# Altium PCB Mach do dong routed.PcbDoc (part 2 of 2)
Units mm, origin at the board's own origin, x right, y up, seen from the top; angles counter-clockwise.
Board outline 79.99 x 80 mm, 4 copper layers (Top Layer, Int1 (GND), Int2 (PWR), Bottom Layer), stack 1.566 mm thick; 97 components, 75 nets, 365 pads, 457 vias.
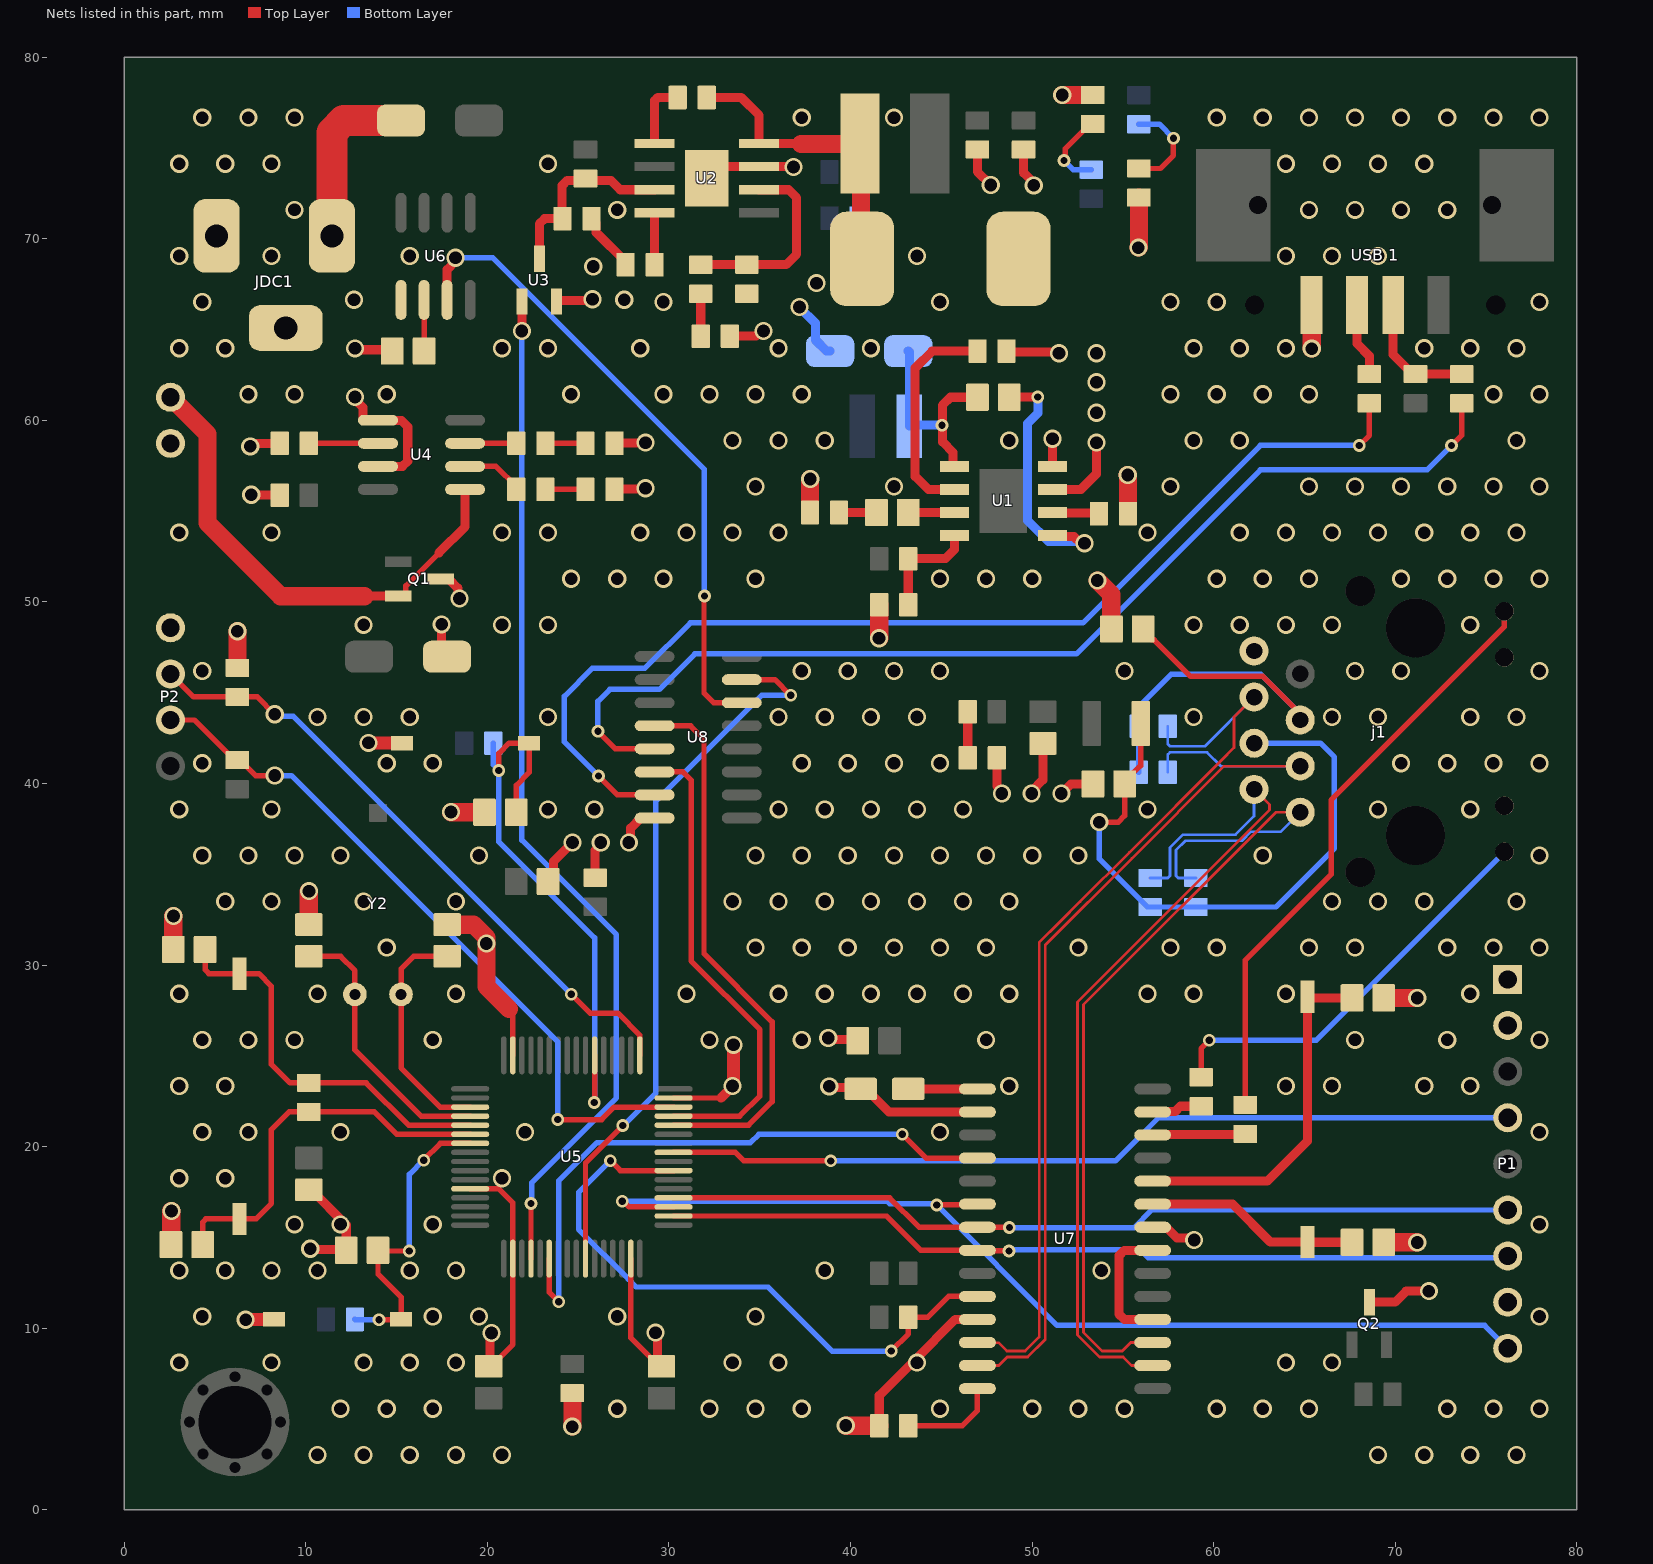
[diagram p4: the nets of this part, all layers, seen from the top]

## Via types
v1: diameter 1, hole 0.7, Top Layer to Bottom Layer, tented both sides, 423 vias
v2: diameter 0.7, hole 0.4, Top Layer to Bottom Layer, tented both sides, 34 vias

## Nets (pads, with @x,y where several pads share a name; then routed paths per layer and width w, separated by ;. In a path a pad name is that pad's centre, name@x,y a point inside that pad or via, vN(x,y) a via of type N, cw(c..) or ccw(c..) an arc to the next point about the centre after c; other vN are vias at no path point) (continued)
GND: "USB 1.4" C3.2 C4.2 C6.2 C7.2 C8.1 C9.2 C10.2 C11.1 C12.1 C13.1 C14.2 C15.1 C16.2 C17.2 C18.1 C19.2 C20.1 C21.1 C22.1 C23.1 C24.2 C25.1 D2.1 D3.1 D5.2 D6.2 D7.2 D8.2 D9.2 j1.8 j1.10 j1.11 JDC1.2 JDC1.3 ON/OFF.2 P1.2 P2.4 P3.2 R6.2 R7.2 R8.1 R10.2 R11.2 R12.1 R13.1 R19.1 R20.1 R21.2 R24.1 R37.2 RESET1.2 U1.8 U2.7 U2.9 U3.2 U4.1 U4.3 U5.12 U5.18 U5.31 U5.47 U5.63 U6.5 U7.2 U7.11 U7.18 U7.21 U7.22 U8.8 | length 161.5
  Top Layer w0.3: U5.12@19.05,17.679 20.624,17.679 21.4,16.903 U5.18@21.4,13.829 21.4,9.104 C10.2@20.191,7.895 ; 21.184,27.584 21.4,27.368 U5.63@21.4,25.029 ; U5.31@27.9,13.829 27.9,9.461 29.466,7.895 C16.2@29.591,7.895 ; U5.47@30.25,22.679 32.864,22.679
  Top Layer w0.5: C13.1@2.568,14.605 C13.1@2.579,14.616 ; v1@2.579,16.448 v1(2.591,16.459) ; v1(6.68,10.465) v1@6.694,10.479 ; v1(6.934,58.572) 7.07,58.572 7.236,58.739 R19.1@8.56,58.739 R19.1@8.549,58.75 ; v1(6.985,55.905) 6.998,55.893 8.547,55.893 R21.2@8.56,55.88 ; C9.2@10.16,17.619 10.285,17.619 12.22,15.684 C17.2@12.22,14.289 12.176,14.333 10.28,14.333 v1(10.236,14.376) ; v1(12.7,61.29) 12.7,61.155 13.151,60.704 13.151,60.055 13.197,60.009 U4.1@13.97,60.009 13.989,59.99 15.27,59.99 15.611,59.649 15.611,57.762 15.318,57.469 U4.3@13.97,57.469 ; v1(12.7,63.97) 12.775,63.894 14.685,63.894 C14.2@14.76,63.819 ; C10.2@20.066,7.895 20.142,7.971 20.142,9.652 v1(20.218,9.728) ; C8.1@23.34,34.609 23.633,34.902 23.633,35.712 23.647,35.712 v1(24.689,36.754) ; U3.2@23.81,66.549 23.81,66.562 23.86,66.612 25.718,66.612 v1(25.781,66.675) ; R12.1@25.73,71.12 25.98,70.87 25.98,70.36 27.61,68.73 R13.1@27.61,68.58 ; R20.1@25.933,34.811 25.933,36.314 26.238,36.618 v1(26.238,36.754) ; D8.2@27,56.199 27.031,56.23 28.671,56.23 v1(28.702,56.261) ; D7.2@27,58.739 27.018,58.757 28.684,58.757 v1(28.702,58.776) ; v1(27.788,36.754) 27.883,36.849 27.883,37.546 28.437,38.1 U8.8@29.21,38.1 ; v1(29.261,9.754) 29.356,9.658 29.356,8.13 C16.2@29.591,7.895 ; U2.9@32.085,73.344 32.72,73.979 U2.7@34.96,73.979 36.841,73.979 v1(36.855,73.965) ; 32.864,22.679 v1@33.553,23.368 ; C7.2@33.35,64.643 34.79,64.643 35.069,64.922 v1(35.204,64.922) ; v1(38.774,25.984) 38.85,25.908 40.324,25.908 C11.1@40.4,25.832 ; v1(38.825,23.317) 38.894,23.248 40.491,23.248 C19.2@40.56,23.179 40.845,23.179 42.115,21.909 U7.2@46.99,21.909 ; R37.2@41.58,4.623 41.58,6.286 43.527,8.232 45.773,10.479 U7.11@46.99,10.479 ; C4.2@46.99,74.919 46.99,73.711 v1(47.727,72.974) ; D9.2@48.057,41.416 48.057,39.861 48.336,39.582 v1(48.336,39.446) ; C3.2@49.53,74.919 49.53,73.643 50.089,73.084 v1(50.089,72.949) ; v1(49.975,39.446) 49.975,39.582 50.597,40.204 C23.1@50.597,42.206 ; U1.8@51.12,57.469 v1(51.12,58.994) ; v1(51.613,39.446) 52.146,39.98 C20.1@53.354,39.98 ; C25.1@54.363,48.521 C25.1@54.37,48.514 ; U7.18@56.642,10.479 55.081,10.479 54.788,10.772 54.788,13.996 55.081,14.289 U7.21@56.642,14.289 ; U7.22@56.642,15.559 57.383,15.559 57.987,14.955 58.832,14.955 v1(58.928,14.859)
  Top Layer w0.7: v1@6.694,10.479 RESET1.2@8.24,10.479 ; v1@13.465,42.229 ON/OFF.2@15.296,42.229 ; v1@33.553,23.368 v1(33.553,25.603)
  Top Layer w1: C13.1@2.579,14.616 v1@2.579,16.448 ; C12.1@2.695,30.861 v1@2.695,32.692 ; R7.2@6.223,46.369 v1(6.223,48.387) ; C18.1@10.16,32.23 v1@10.16,34.061 ; C15.1@17.78,32.23 17.786,32.224 19.234,32.224 19.939,31.519 v1(19.939,31.191) 19.939,28.829 21.184,27.584 ; v1@18.009,38.419 C24.2@19.84,38.419 ; v1@24.679,4.589 R24.1@24.679,6.42 ; R10.2@37.77,54.929 v1@37.77,56.76 ; v1@39.749,4.623 R37.2@41.58,4.623 ; v1@41.58,48.018 R6.2@41.58,49.849 ; v1(51.663,77.927) D5.2@53.34,77.927 ; v1(53.594,51.181) 54.363,50.412 C25.1@54.363,48.521 ; v1(55.27,56.998) 55.283,56.985 R11.2@55.283,54.864 ; v1(55.855,69.52) 55.88,69.545 D6.2@55.88,72.277 ; 65.39,66.359 65.405,66.344 v1(65.405,63.957) ; C22.1@69.375,14.732 v1@71.206,14.732 ; C21.1@69.375,28.194 v1@71.206,28.194
  Bottom Layer w0.5: v1(37.186,66.243) 38.069,65.359 38.069,64.43 38.68,63.819 D3.1@38.88,63.819
  other v1: 10.64,3.019 13.18,3.019 15.72,3.019 18.26,3.019 20.8,3.019 69.06,3.019 71.6,3.019 74.14,3.019 76.68,3.019 24.667,4.577 39.737,4.634 11.91,5.559 14.45,5.559 16.99,5.559 27.15,5.559 32.23,5.559 34.77,5.559 37.31,5.559 44.93,5.559 50.01,5.559 52.55,5.559 55.09,5.559 60.17,5.559 62.71,5.559 65.25,5.559 72.87,5.559 75.41,5.559 77.95,5.559 3.02,8.099 8.1,8.099 13.18,8.099 15.72,8.099 18.26,8.099 33.5,8.099 36.04,8.099 43.66,8.099 63.98,8.099 66.52,8.099 4.29,10.639 16.99,10.639 19.53,10.639 27.15,10.639 34.77,10.639 77.95,10.639 3.02,13.179 5.56,13.179 8.1,13.179 10.64,13.179 15.72,13.179 18.26,13.179 38.58,13.179 53.82,13.179 71.218,14.721 9.37,15.719 11.91,15.719 16.99,15.719 77.95,15.719 3.02,18.259 5.56,18.259 20.8,18.259 4.29,20.799 6.83,20.799 11.91,20.799 22.07,20.799 44.93,20.799 77.95,20.799 3.02,23.339 5.56,23.339 33.5,23.339 48.74,23.339 63.98,23.339 66.52,23.339 71.6,23.339 74.14,23.339 4.29,25.879 6.83,25.879 9.37,25.879 16.99,25.879 32.23,25.879 37.31,25.879 47.47,25.879 67.79,25.879 72.87,25.879 77.95,25.879 71.218,28.183 3.02,28.419 10.64,28.419 18.26,28.419 30.96,28.419 36.04,28.419 38.58,28.419 41.12,28.419 43.66,28.419 46.2,28.419 48.74,28.419 56.36,28.419 58.9,28.419 63.98,28.419 74.14,28.419 14.45,30.959 34.77,30.959 37.31,30.959 39.85,30.959 42.39,30.959 44.93,30.959 47.47,30.959 52.55,30.959 57.63,30.959 60.17,30.959 65.25,30.959 67.79,30.959 72.87,30.959 75.41,30.959 77.95,30.959 2.706,32.704 5.56,33.499 8.1,33.499 13.18,33.499 18.26,33.499 33.5,33.499 36.04,33.499 38.58,33.499 41.12,33.499 43.66,33.499 46.2,33.499 48.74,33.499 66.52,33.499 69.06,33.499 71.6,33.499 76.68,33.499 10.171,34.073 4.29,36.039 6.83,36.039 9.37,36.039 11.91,36.039 19.53,36.039 34.77,36.039 37.31,36.039 39.85,36.039 42.39,36.039 44.93,36.039 47.47,36.039 50.01,36.039 52.55,36.039 62.71,36.039 77.95,36.039 17.997,38.43 3.02,38.579 8.1,38.579 23.34,38.579 25.88,38.579 36.04,38.579 38.58,38.579 41.12,38.579 43.66,38.579 46.2,38.579 56.36,38.579 69.06,38.579 74.14,38.579 4.29,41.119 14.45,41.119 16.99,41.119 37.31,41.119 39.85,41.119 42.39,41.119 44.93,41.119 70.33,41.119 72.87,41.119 75.41,41.119 77.95,41.119 13.453,42.24 10.64,43.659 13.18,43.659 15.72,43.659 23.34,43.659 36.04,43.659 38.58,43.659 41.12,43.659 43.66,43.659 58.9,43.659 66.52,43.659 69.06,43.659 74.14,43.659 76.68,43.659 4.29,46.199 37.31,46.199 39.85,46.199 42.39,46.199 44.93,46.199 55.09,46.199 67.79,46.199 70.33,46.199 77.95,46.199 41.569,48.006 13.18,48.739 20.8,48.739 23.34,48.739 58.9,48.739 61.44,48.739 63.98,48.739 66.52,48.739 74.14,48.739 24.61,51.279 27.15,51.279 29.69,51.279 34.77,51.279 44.93,51.279 47.47,51.279 50.01,51.279 60.17,51.279 62.71,51.279 65.25,51.279 70.33,51.279 72.87,51.279 75.41,51.279 77.95,51.279 3.02,53.819 8.1,53.819 20.8,53.819 23.34,53.819 28.42,53.819 30.96,53.819 33.5,53.819 36.04,53.819 56.36,53.819 61.44,53.819 63.98,53.819 66.52,53.819 69.06,53.819 71.6,53.819 74.14,53.819 76.68,53.819 34.77,56.359 42.39,56.359 57.63,56.359 65.25,56.359 67.79,56.359 70.33,56.359 72.87,56.359 75.41,56.359 77.95,56.359 37.781,56.772 33.5,58.899 36.04,58.899 38.58,58.899 48.74,58.899 58.9,58.899 61.44,58.899 76.68,58.899 6.83,61.439 9.37,61.439 14.45,61.439 24.61,61.439 29.69,61.439 32.23,61.439 34.77,61.439 37.31,61.439 57.63,61.439 60.17,61.439 62.71,61.439 65.25,61.439 75.41,61.439 77.95,61.439 3.02,63.979 5.56,63.979 20.8,63.979 23.34,63.979 28.42,63.979 36.04,63.979 41.12,63.979 58.9,63.979 61.44,63.979 63.98,63.979 71.6,63.979 74.14,63.979 76.68,63.979 4.29,66.519 29.69,66.519 44.93,66.519 57.63,66.519 60.17,66.519 77.95,66.519 12.649,66.65 27.534,66.65 38.125,67.564 25.832,68.478 3.02,69.059 8.1,69.059 15.72,69.059 43.66,69.059 63.98,69.059 66.52,69.059 69.06,69.059 9.37,71.599 27.15,71.599 65.25,71.599 67.79,71.599 70.33,71.599 72.87,71.599 3.02,74.139 5.56,74.139 8.1,74.139 23.34,74.139 63.98,74.139 66.52,74.139 69.06,74.139 71.6,74.139 4.29,76.679 6.83,76.679 9.37,76.679 37.31,76.679 42.39,76.679 60.17,76.679 62.71,76.679 65.25,76.679 67.79,76.679 70.33,76.679 72.87,76.679 75.41,76.679 77.95,76.679
H_SENSOR_CURRENT: U6.7 U8.14 | length 35.7
  Top Layer w0.3: v2(31.95,50.325) 31.928,50.303 31.928,44.983 32.461,44.45 U8.14@34.01,44.45
  Top Layer w0.5: U6.7@17.78,66.639 17.78,68.312 18.237,68.77 v1(18.237,68.961)
  Bottom Layer w0.3: v1(18.237,68.961) 20.295,68.961 31.95,57.306 v2(31.95,50.325)
H_USB_D+: R25.1 U8.7 | length 60.8
  Top Layer w0.3: v2(26.111,40.411) 27.153,39.37 U8.7@29.21,39.37 ; v2(68.021,58.623) 68.58,59.182 R25.1@68.58,60.949
  Bottom Layer w0.3: v2(26.111,40.411) 24.232,42.291 24.232,44.806 25.781,46.355 28.677,46.355 31.178,48.856 52.806,48.856 62.573,58.623 v2(68.021,58.623)
H_USB_D-: R26.1 U8.5 | length 60.6
  Top Layer w0.3: v2(26.086,42.875) 27.051,41.91 U8.5@29.21,41.91 ; v2(73.101,58.623) 73.66,59.182 R26.1@73.66,60.949
  Bottom Layer w0.3: v2(26.086,42.875) 26.086,44.526 26.746,45.187 29.464,45.187 31.42,47.142 52.442,47.142 62.577,57.277 71.755,57.277 v2(73.101,58.623)
INT_ETH: U5.22 U7.4 | length 33.9
  Top Layer w0.3: U5.22@23.4,13.829 23.4,11.982 v2(23.927,11.455) ; v2(42.85,20.676) 44.163,19.362 46.983,19.362 U7.4@46.99,19.369
  Bottom Layer w0.3: v2(23.927,11.455) 23.927,12.7 23.927,18.11 26.035,20.218 31.547,20.218 34.49,20.218 34.947,20.676 v2(42.85,20.676)
JTCK/SWCLK: P2.3 R7.1 U5.49 | length 35.2
  Top Layer w0.3: P2.3@2.54,46.039 3.81,44.769 R7.1@6.223,44.769 7.326,44.769 v1(8.28,43.815) ; v2(24.613,28.397) 25.654,27.356 27.178,27.356 28.4,26.134 U5.49@28.4,25.029
  Bottom Layer w0.3: v1(8.28,43.815) 8.395,43.701 9.309,43.701 v2(24.613,28.397)
JTMS/SWDIO: P2.2 R1.2 U5.46 | length 39.6
  Top Layer w0.3: P2.2@2.54,43.499 3.863,43.499 6.073,41.289 R1.2@6.223,41.289 6.373,41.289 7.225,40.437 v1@8.255,40.437 ; v2(23.876,21.488) 26.289,21.488 26.98,22.179 U5.46@30.25,22.179
  Bottom Layer w0.3: v1(8.28,40.437) 9.195,40.437 23.52,26.111 23.876,25.756 v2(23.876,21.488)
L_SENSOR_CURRENT: U5.26 U8.15 | length 39.7
  Top Layer w0.3: U5.26@25.4,13.829 25.4,19.101 v2(27.457,21.158) ; U8.15@34.01,45.72 35.839,45.72 v2(36.703,44.856)
  Bottom Layer w0.3: v2(27.457,21.158) 27.483,21.158 29.261,22.936 29.261,26.111 29.261,39.014 35.103,44.856 v2(36.703,44.856)
L_USB_D+: U5.45 U8.6 | length 26.4
  Top Layer w0.3: U8.6@29.21,40.64 30.759,40.64 31.217,40.183 31.217,30.226 35.001,26.441 35.001,22.784 33.896,21.679 31.547,21.679 U5.45@30.25,21.679
L_USB_D-: U5.44 U8.4 | length 30.5
  Top Layer w0.3: U8.4@29.21,43.18 31.191,43.18 31.928,42.443 31.928,30.632 35.687,26.873 35.687,22.479 34.387,21.179 31.547,21.179 U5.44@30.25,21.179
LEDA: j1.9 R29.1 | length 22.8
  Top Layer w0.3: R29.1@59.309,23.825 59.309,25.4 v2(59.766,25.857)
  Bottom Layer w0.3: v2(59.766,25.857) 65.643,25.857 j1.9@76.02,36.234
LEDB: j1.12 R30.1 | length 33.1
  Top Layer w0.3: R30.1@61.747,22.301 61.747,30.277 66.472,35.001 66.472,39.091 76.02,48.639 j1.12@76.02,49.484
MISO_2: P1.9 U5.35 U7.6 | length 57.3
  Top Layer w0.3: v2(27.432,16.993) 27.494,16.993 27.808,16.679 U5.35@30.25,16.679 ; v2(44.755,16.789) 44.775,16.809 46.97,16.809 U7.6@46.99,16.829
  Bottom Layer w0.3: v2(27.432,16.993) 42.012,16.993 42.162,16.843 44.702,16.843 v2(44.755,16.789) 51.384,10.16 74.93,10.16 P1.9@76.2,8.89
MOSI_2: P1.6 U5.36 U7.7 | length 47
  Top Layer w0.3: U5.36@30.25,17.179 42.155,17.179 43.775,15.559 U7.7@46.99,15.559 46.995,15.555 48.745,15.555 v2(48.75,15.55)
  Bottom Layer w0.3: v2(48.75,15.55) 48.775,15.525 55.606,15.525 56.591,16.51 P1.6@76.2,16.51
NetC1_1: C1.1 D2.2 L2.1 U2.8 | length 16.8
  Top Layer w0.5: C1.1@32.08,77.789 33.971,77.789 34.96,76.8 U2.8@34.96,75.249 37.273,75.249 37.287,75.235
  Top Layer w1: 37.287,75.235 40.499,75.235 L2.1@40.513,75.249 40.577,75.186 40.577,68.963 D2.2@40.64,68.899
NetC1_2: C1.2 U2.1 | length 3.7
  Top Layer w0.5: U2.1@29.21,75.249 29.21,77.613 29.386,77.789 C1.2@30.48,77.789
NetC2_1: C2.1 U1.5 | length 14.2
  Top Layer w0.5: C2.1@48.74,61.279 48.746,61.285 50.312,61.285 v2(50.317,61.29) ; U1.5@51.12,53.659 51.175,53.604 52.309,53.604 52.674,53.238 v1(52.883,53.238)
  Bottom Layer w0.5: v2(50.317,61.29) 50.317,60.401 49.759,59.842 49.759,54.483 50.911,53.33 52.791,53.33 v1(52.883,53.238)
NetC2_2: C2.2 D3.2 L1.2 U1.1 | length 11.7
  Top Layer w0.5: U1.1@45.72,57.469 45.71,57.469 45.655,57.524 45.655,58.231 45.069,58.817 45.069,59.706 v2(45.034,59.741) 45.056,59.763 45.056,60.83 45.506,61.279 C2.2@46.99,61.279
  Bottom Layer w0.5: D3.2@43.18,63.819 43.24,63.759 L1.2@43.24,59.69 43.291,59.741 v2(45.034,59.741)
NetC5_1: C5.1 U1.3 | length 2.5
  Top Layer w0.5: C5.1@43.18,54.929 U1.3@45.72,54.929
NetC5_2: C5.2 R10.1 | length 2.1
  Top Layer w0.5: R10.1@39.37,54.929 C5.2@41.43,54.929
NetC6_1: C6.1 R9.2 U2.6 | length 10.9
  Top Layer w0.5: R9.2@31.75,68.58 36.449,68.58 37.033,69.164 37.033,72.263 36.587,72.709 U2.6@34.96,72.709
NetC7_1: C7.1 R9.1 | length 2.3
  Top Layer w0.5: C7.1@31.75,64.643 R9.1@31.75,66.98
NetC14_1: C14.1 U6.6 | length 2.8
  Top Layer w0.3: C14.1@16.51,63.819 U6.6@16.51,66.639
NetC19_1: C19.1 U7.1 | length 3.8
  Top Layer w0.5: C19.1@43.18,23.179 U7.1@46.99,23.179
NetC20_2: C20.2 j1.4 L3.1 R27.1 R33.SS | length 34.2
  Top Layer w0.3: v1(53.7,37.875) 54.75,37.875 55.104,38.229 C20.2@55.104,39.98 55.104,40.105 55.985,40.986 L3.1@55.985,43.307
  Bottom Layer w0.3: v1(53.7,37.875) 53.7,35.85 56.35,33.2 R33.SS@56.5,33.2 R27.1@59.025,33.2 63.425,33.2 66.65,36.425 66.65,41.45 65.881,42.219 j1.4@62.23,42.219
NetC21_2: C21.2 U7.24 Y3.2 | length 19.7
  Top Layer w0.5: U7.24@56.642,18.099 62.955,18.099 65.176,20.32 65.176,28.129 65.241,28.194 C21.2@67.625,28.194
NetC22_2: C22.2 U7.23 Y3.1 | length 11.9
  Top Layer w0.5: U7.23@56.642,16.829 61.047,16.829 63.13,14.746 Y3.1@65.176,14.746 65.191,14.732 C22.2@67.625,14.732
NetC25_2: C25.2 j1.5 R36.1 R38.2 | length 25.5
  Top Layer w0.3: C25.2@56.12,48.514 56.12,48.389 56.595,47.914 56.72,47.914 58.725,45.909 62.706,45.909 64.77,43.845 j1.5@64.77,43.499
  Bottom Layer w0.3: R36.1@55.875,40.625 R38.2@55.875,43.15 55.875,44.225 57.675,46.025 62.59,46.025 64.77,43.845 j1.5@64.77,43.499
NetD1_1: D1.1 JDC1.1 | length 9.8
  Top Layer w1.7: JDC1.1@11.43,70.169 11.43,75.87 12.079,76.519 D1.1@15.24,76.519
NetD5_1: D5.1 R14.1 | length 4.5
  Top Layer w0.3: v2(51.754,74.32) 51.831,74.397 51.831,74.968 53.19,76.327 D5.1@53.34,76.327
  Bottom Layer w0.3: v2(51.754,74.32) 51.754,74.311 52.253,73.812 R14.1@53.264,73.812
NetD6_1: D6.1 R16.1 | length 5.4
  Top Layer w0.3: D6.1@55.88,73.877 57.063,73.877 57.785,74.6 v2(57.785,75.54)
  Bottom Layer w0.3: R16.1@55.88,76.316 57.009,76.316 v2(57.785,75.54)
NetD7_1: D7.1 R15.1 | length 2.2
  Top Layer w0.3: R15.1@23.19,58.739 D7.1@25.4,58.739
NetD8_1: D8.1 R18.1 | length 2.2
  Top Layer w0.3: R18.1@23.19,56.199 D8.1@25.4,56.199
NetD9_1: D9.1 R32.1 | length 2.5
  Top Layer w0.5: D9.1@46.457,41.416 R32.1@46.457,43.956
NetR2_2: R2.2 R6.1 U1.4 | length 6.1
  Top Layer w0.5: R6.1@43.18,49.849 R2.2@43.18,52.389 45.226,52.389 45.72,52.883 U1.4@45.72,53.659
NetR3_1: R3.1 U1.2 | length 12.2
  Top Layer w0.5: U1.2@45.72,56.199 44.283,56.199 43.561,56.921 43.561,62.89 44.49,63.819 R3.1@46.99,63.819
NetR5_1: R5.1 R12.2 U2.3 U3.3 | length 10.7
  Top Layer w0.5: U3.3@22.86,68.899 22.86,70.827 23.153,71.12 R12.2@24.13,71.12 24.105,71.145 24.105,72.935 24.397,73.228 25.298,73.228 R5.1@25.4,73.33 25.505,73.225 26.8,73.225 27.316,72.709 U2.3@29.21,72.709
NetR11_1: R11.1 U1.6 | length 2.6
  Top Layer w0.5: U1.6@51.12,54.929 51.153,54.896 53.651,54.896 R11.1@53.683,54.864
NetR13_2: R13.2 U2.4 | length 2.9
  Top Layer w0.5: R13.2@29.21,68.58 U2.4@29.21,71.439
NetR15_2: R15.2 U4.7 | length 2.8
  Top Layer w0.3: U4.7@18.77,58.739 R15.2@21.59,58.739
NetR18_2: R18.2 U4.6 | length 3.4
  Top Layer w0.3: U4.6@18.77,57.469 20.47,57.469 21.59,56.349 R18.2@21.59,56.199
NetR19_2: R19.2 U4.2 | length 3.8
  Top Layer w0.3: R19.2@10.16,58.739 U4.2@13.97,58.739
NetR25_2: "USB 1.3" R25.2 | length 4.1
  Top Layer w0.5: 67.89,66.359 67.89,64.241 68.58,63.551 R25.2@68.58,62.549
NetR26_2: "USB 1.2" R26.2 R28.2 | length 6.9
  Top Layer w0.5: 69.89,66.359 69.89,63.629 70.97,62.549 R28.2@71.12,62.549 R26.2@73.66,62.549
NetR29_2: R29.2 U7.27 | length 2.8
  Top Layer w0.5: U7.27@56.642,21.909 56.663,21.93 57.871,21.93 58.166,22.225 R29.2@59.309,22.225
NetR30_2: R30.2 U7.26 | length 5.1
  Top Layer w0.5: U7.26@56.642,20.639 56.663,20.66 61.706,20.66 R30.2@61.747,20.701
NetR37_1: R37.1 U7.14 | length 5.4
  Top Layer w0.3: R37.1@43.18,4.623 46.152,4.623 46.99,5.461 U7.14@46.99,6.669
OSC_IN1: C15.2 U5.3 Y2.2 | length 13
  Top Layer w0.3: C15.2@17.78,30.48 15.926,30.48 15.24,29.794 Y2.2@15.24,28.386 15.24,24.333 17.394,22.179 U5.3@19.05,22.179
OSC_IN2: C12.2 R22.2 U5.5 Y1.2 | length 21.8
  Top Layer w0.3: C12.2@4.445,30.861 4.445,29.743 4.659,29.529 Y1.2@6.35,29.529 7.403,29.529 8.103,28.829 8.103,24.536 9.13,23.509 R22.2@10.16,23.509 13.321,23.509 15.651,21.179 17.856,21.179 U5.5@19.05,21.179
OSC_OUT1: C18.2 U5.4 Y2.1 | length 15.1
  Top Layer w0.3: C18.2@10.16,30.48 11.913,30.48 12.7,29.693 Y2.1@12.7,28.386 12.7,25.324 16.345,21.679 U5.4@19.05,21.679
OSC_OUT2: C13.2 R22.1 U5.6 Y1.1 | length 21.4
  Top Layer w0.3: C13.2@4.318,14.605 4.318,15.84 4.494,16.016 Y1.1@6.35,16.016 7.253,16.016 8.103,16.866 8.103,20.93 9.082,21.909 R22.1@10.16,21.909 13.778,21.909 15.008,20.679 17.856,20.679 U5.6@19.05,20.679
PW_EN: U3.1 U5.20 | length 56.8
  Top Layer w0.3: U5.20@22.4,13.829 22.4,16.863 v2(22.403,16.866)
  Top Layer w0.5: v1(21.895,64.922) 21.902,64.93 21.902,66.541 U3.1@21.91,66.549
  Bottom Layer w0.3: v1(21.895,64.922) 21.895,36.881 27.102,31.674 27.102,26.111 27.102,22.682 22.441,18.021 22.441,16.904 v2(22.403,16.866)
PW_ON/OFF: C24.1 ON/OFF.1 R31.1 U5.54 | length 31.7
  Top Layer w0.3: v2(20.625,40.716) 20.625,41.656 21.198,42.229 ON/OFF.1@22.296,42.229 22.296,40.609 21.59,39.903 C24.1@21.59,38.419 ; v2(25.883,22.428) 25.9,22.446 U5.54@25.9,25.029
  Bottom Layer w0.3: R31.1@20.32,42.229 20.32,41.046 20.625,40.742 v2(20.625,40.716) 20.625,36.779 25.908,31.496 25.908,26.111 25.908,22.454 v2(25.883,22.428)
RESET: C17.1 R23.1 RESET1.1 U5.7 | length 16.9
  Top Layer w0.3: v2(14.021,10.465) 14.028,10.472 15.233,10.472 RESET1.1@15.24,10.479 15.24,11.709 13.97,12.979 C17.1@13.97,14.289 14.01,14.249 v2(15.697,14.249) ; v2(16.485,19.253) 17.41,20.179 U5.7@19.05,20.179
  Bottom Layer w0.3: R23.1@12.7,10.479 12.714,10.465 v2(14.021,10.465) ; v2(15.697,14.249) 15.697,18.466 v2(16.485,19.253)
RESET_ETH: R35.1 U5.39 U7.10 | length 34.8
  Top Layer w0.3: v2(26.772,19.228) 27.32,18.679 U5.39@30.25,18.679 ; v2(42.24,8.738) 43.18,9.677 R35.1@43.18,10.606 44.261,10.606 45.404,11.749 U7.10@46.99,11.749
  Bottom Layer w0.3: v2(26.772,19.228) 25.019,17.475 25.019,15.443 27.762,12.7 28.194,12.268 35.458,12.268 38.989,8.738 v2(42.24,8.738)
RESET_LCD: P1.4 U5.41 | length 47.1
  Top Layer w0.3: U5.41@30.25,19.679 33.661,19.679 34.126,19.214 v2(38.913,19.214)
  Bottom Layer w0.3: v2(38.913,19.214) 54.596,19.214 56.972,21.59 P1.4@76.2,21.59
SCK_2: P1.7 U5.34 U7.8 | length 47
  Top Layer w0.3: U5.34@30.25,16.179 41.987,16.179 43.877,14.289 U7.8@46.99,14.289 47.009,14.27 48.705,14.27 v2(48.725,14.25)
  Bottom Layer w0.3: v2(48.725,14.25) 48.801,14.326 55.956,14.326 56.411,13.871 76.101,13.871 P1.7@76.2,13.97
TPIN+: j1.3 R36.2 U7.13 | length 52.8
  Top Layer w0.15: U7.13@46.99,7.939 48.164,7.939 48.632,8.407 49.757,8.407 50.725,9.375 50.725,31.102 55.498,35.874 60.582,40.959 j1.3@64.77,40.959
  Bottom Layer w0.15: R36.2@57.475,40.625 57.475,41.599 57.597,41.72 59.63,41.72 60.391,40.959 j1.3@64.77,40.959
TPIN-: j1.6 R38.1 U7.12 | length 51
  Top Layer w0.15: U7.12@46.99,9.209 46.998,9.201 48.149,9.201 48.609,8.741 49.618,8.741 50.39,9.514 50.39,31.24 51.537,32.387 52.65,33.5 55.359,36.209 60.432,41.282 61.126,41.976 61.126,43.655 j1.6@62.23,44.759
  Bottom Layer w0.15: R38.1@57.475,43.15 57.475,42.176 57.597,42.055 59.526,42.055 j1.6@62.23,44.759
TPOUT+: j1.1 R27.2 U7.17 | length 49.1
  Top Layer w0.15: U7.17@56.642,9.209 55.434,9.209 54.966,8.741 53.857,8.741 52.835,9.764 52.835,27.826 63.427,38.419 j1.1@64.77,38.419
  Bottom Layer w0.15: R27.2@59.025,34.8 58.051,34.8 57.93,34.922 57.93,36.33 58.45,36.85 61.548,36.85 62.048,37.35 63.701,37.35 j1.1@64.77,38.419
TPOUT-: j1.2 R33.1 U7.16 | length 49.1
  Top Layer w0.15: U7.16@56.642,7.939 56.636,7.945 55.48,7.945 55.018,8.407 53.718,8.407 52.5,9.625 52.5,27.965 63.075,38.54 63.075,38.834 j1.2@62.23,39.679
  Bottom Layer w0.15: R33.1@56.5,34.8 57.474,34.8 57.595,34.922 57.595,36.468 58.311,37.185 61.21,37.185 62.23,38.205 j1.2@62.23,39.679
V4.7V: D4.2 Q1.3 R3.2 U1.7 | length 11.1
  Top Layer w0.5: Q1.3@17.431,51.269 17.856,51.269 18.37,50.755 18.37,50.286 v1(18.466,50.19) ; v1(17.475,48.768) 17.475,47.295 D4.2@17.78,46.99 ; R3.2@48.59,63.819 48.648,63.761 51.428,63.761 v1(51.486,63.703) ; U1.7@51.12,56.199 52.694,56.199 53.543,57.048 v1(53.543,58.776)
  other v1: 53.543,60.427 53.543,62.103 53.543,63.703
V_LCD: P1.1 P1.8 Q2.3 | length 3.5
  Top Layer w0.5: Q2.3@68.58,11.43 70.002,11.43 70.612,12.04 v1(71.857,12.04)
VBAT: P3.1 Q1.2 U4.5 | length 27.5
  Top Layer w0.3: Q1.2@15.081,50.319 15.361,50.319 15.511,50.469 15.511,50.894 17.323,52.705
  Top Layer w0.5: 13.235,50.319 Q1.2@15.081,50.319 ; 17.323,52.705 18.77,54.152 U4.5@18.77,56.199
  Top Layer w1: P3.1@2.54,61.279 4.572,59.247 4.572,54.356 8.609,50.319 13.235,50.319
pads on no net: "USB 1.0" Designator3. Designator3.1 j1.0 j1.7 U1.0 U5.2 U5.8 U5.9 U5.10 U5.11 U5.14 U5.15 U5.16 U5.17 U5.23 U5.25 U5.27 U5.29 U5.30 U5.40 U5.42 U5.43 U5.50 U5.51 U5.52 U5.53 U5.55 U5.56 U5.57 U5.58 U5.59 U5.61 U5.62 U7.3 U7.5 U8.2 U8.3 U8.9 U8.10 U8.11 U8.12 U8.13 U8.16 Y2.0

## Polygon pours and split planes (outlines as drawn)
GND on Bottom Layer "GND_L04_P001" (solid, remove dead copper, pour order 1): 0,0 0,80.01 80.01,80.01 80.01,0
GND on Top Layer "GND_L01_P000" (solid, remove dead copper, pour order 0): 0,0 0,80.01 80.01,80.01 80.01,0
GND on Int1 (GND) (split plane): 79.485,0.51 0.51,0.51 0.51,79.489 79.485,79.489
DC5V_IN on Int2 (PWR) (split plane): 79.485,63.202 70.532,63.202 70.532,67.925 70.525,67.994 70.505,68.06 70.473,68.12 70.429,68.174 70.376,68.217 70.315,68.25 70.249,68.27 70.18,68.277 61.151,68.277 57.754,71.673 57.701,71.717 57.64,71.75 57.574,71.77 57.506,71.776 46.66,71.776 46.591,71.77 46.525,71.75 46.464,71.717 46.411,71.673 46.367,71.62 46.335,71.559 46.315,71.493 46.308,71.425 46.308,66.815 46.308,66.802 46.308,60.321 25.146,60.321 25.077,60.314 25.011,60.294 24.951,60.262 24.897,60.218 24.854,60.165 24.821,60.104 24.801,60.038 24.794,59.969 24.794,52.93 17.501,52.93 17.432,52.923 17.366,52.903 17.305,52.87 17.252,52.827 14.966,50.541 14.922,50.487 14.89,50.427 14.87,50.361 14.863,50.292 14.863,46.63 8.505,46.63 8.505,51.206 8.498,51.275 8.478,51.341 8.446,51.402 8.402,51.455 8.349,51.499 8.288,51.531 8.222,51.551 8.153,51.558 0.51,51.558 0.51,56.544 4.851,56.544 4.92,56.551 4.986,56.571 5.047,56.604 5.1,56.647 5.144,56.701 5.176,56.761 5.196,56.827 5.203,56.896 5.203,62.992 5.196,63.061 5.176,63.127 5.144,63.187 5.1,63.241 5.047,63.284 4.986,63.317 4.92,63.337 4.851,63.344 0.51,63.344 0.51,67.568 24.257,67.568 24.326,67.575 24.392,67.595 24.452,67.627 24.506,67.671 24.549,67.724 24.582,67.785 24.602,67.851 24.609,67.92 24.609,69.879 31.687,69.879 31.755,69.886 31.821,69.906 31.882,69.939 31.935,69.982 31.979,70.036 32.011,70.096 32.031,70.162 32.038,70.231 32.038,79.489 79.485,79.489
DC9V on Int2 (PWR) (split plane): 21.492,71.014 17.7,71.014 17.7,79.489 21.492,79.489
V_LCD on Int2 (PWR) (split plane): 79.485,7.464 74.568,7.464 70.176,11.855 70.176,30.89 79.485,30.89
V4.7V on Int2 (PWR) (split plane): 55.973,55.317 37.846,55.317 37.777,55.311 37.711,55.291 37.651,55.258 37.597,55.214 37.554,55.161 37.521,55.1 37.501,55.034 37.494,54.966 37.494,49.729 25.324,49.729 25.255,49.723 25.189,49.703 25.128,49.67 25.075,49.626 25.031,49.573 24.999,49.512 24.979,49.446 24.972,49.378 24.972,46.63 15.566,46.63 15.566,50.146 17.646,52.226 25.146,52.226 25.215,52.233 25.281,52.253 25.341,52.286 25.395,52.329 25.438,52.383 25.471,52.443 25.491,52.509 25.498,52.578 25.498,59.618 46.66,59.618 46.728,59.624 46.794,59.644 46.855,59.677 46.908,59.721 46.952,59.774 46.985,59.835 47.005,59.901 47.011,59.969 47.011,66.476 55.973,66.476
DC9V_IN on Int2 (PWR) (split plane): 31.335,70.583 24.257,70.583 24.188,70.576 24.122,70.556 24.062,70.523 24.008,70.48 23.965,70.426 23.932,70.366 23.912,70.3 23.905,70.231 23.905,68.271 0.51,68.271 0.51,79.489 16.997,79.489 16.997,70.663 17.003,70.594 17.023,70.528 17.056,70.467 17.1,70.414 17.153,70.37 17.214,70.338 17.28,70.318 17.348,70.311 21.844,70.311 21.913,70.318 21.979,70.338 22.039,70.37 22.093,70.414 22.136,70.467 22.169,70.528 22.189,70.594 22.196,70.663 22.196,79.489 31.335,79.489
VBAT on Int2 (PWR) (split plane): 4.5,57.248 0.51,57.248 0.51,62.64 4.5,62.64
3V3 on Int2 (PWR) (split plane): 60.757,67.676 60.81,67.633 60.871,67.6 60.937,67.58 61.005,67.573 69.829,67.573 69.829,62.85 69.835,62.781 69.855,62.715 69.888,62.655 69.932,62.601 69.985,62.558 70.046,62.525 70.112,62.505 70.18,62.498 79.485,62.498 79.485,31.594 69.825,31.594 69.756,31.587 69.69,31.567 69.629,31.534 69.576,31.491 69.532,31.437 69.5,31.377 69.48,31.311 69.473,31.242 69.473,11.709 69.48,11.641 69.5,11.575 69.532,11.514 69.576,11.461 74.173,6.863 74.203,6.839 74.227,6.82 74.287,6.787 74.353,6.767 74.422,6.76 79.485,6.76 79.485,0.51 0.51,0.51 0.51,50.855 7.802,50.855 7.802,46.279 7.808,46.21 7.828,46.144 7.861,46.083 7.905,46.03 7.958,45.986 8.019,45.954 8.085,45.934 8.153,45.927 25.324,45.927 25.392,45.934 25.458,45.954 25.519,45.986 25.572,46.03 25.616,46.083 25.649,46.144 25.669,46.21 25.675,46.279 25.675,49.026 37.846,49.026 37.915,49.033 37.981,49.053 38.041,49.085 38.095,49.129 38.138,49.182 38.171,49.243 38.191,49.309 38.198,49.378 38.198,54.614 56.325,54.614 56.394,54.621 56.46,54.641 56.52,54.673 56.574,54.717 56.617,54.77 56.65,54.831 56.67,54.897 56.677,54.966 56.677,66.827 56.67,66.896 56.65,66.962 56.617,67.023 56.574,67.076 56.52,67.12 56.46,67.152 56.394,67.172 56.325,67.179 47.011,67.179 47.011,71.073 57.36,71.073

## Keep-outs
Keep-Out Layer:
  the board outline again, w0.5

## Other copper
Top Layer:
  region net 3V3: 55.245,23.038 55.423,22.86 57.455,22.86 57.658,23.063 57.658,25.298 57.556,25.4 55.296,25.4 55.245,25.349
  region net V4.7V: 16.713,46.101 16.383,46.431 16.383,48.895 16.713,49.225 16.713,51.537 16.764,51.587 19.101,51.587 19.177,51.511 19.177,46.457 18.821,46.101
  region net DC5V_IN: 9.652,56.49 9.703,56.54 14.884,56.54 15.824,55.601 15.824,51.994 15.748,51.918 10.363,51.918 9.652,52.629
  region net 3V3: 55.602,6.834 55.753,6.985 58.674,6.985 58.674,4.967 58.572,4.866 57.293,4.866 55.602,6.556
  region net 3V3: 52.807,42.037 52.578,42.266 52.578,43.053 52.324,43.307 47.625,43.307 47.498,43.434 47.498,46.482 47.752,46.736 53.594,46.736 53.848,46.482 53.848,42.139 53.746,42.037
  region net 3V3: 69.215,9.779 69.342,9.906 70.51,9.906 71.882,8.534 71.882,5.715 71.755,5.588 69.494,5.588 69.215,5.867
  region net 3V3: 42.012,13.716 42.088,13.64 42.088,9.982 42.012,9.906 41.148,9.906 39.751,9.906 39.37,10.287 39.37,13.335 39.751,13.716
  region net 3V3: 55.778,13.335 55.651,13.208 55.651,11.633 55.855,11.43 59.842,11.43 59.969,11.557 59.969,13.208 59.842,13.335
  region net 3V3: 20.041,23.038 20.091,23.089 20.091,23.774 20.295,23.978 20.955,23.978 21.057,24.079 21.057,25.984 20.955,26.086 18.212,26.086 17.983,25.857 17.983,23.114 18.059,23.038
  region net 3V3: 29.21,23.114 29.297,23.027 32.282,23.027 32.282,24.881 32.18,24.982 30.901,24.982 29.21,23.292
  region net 3V3: 30.302,46.863 30.124,46.685 27.33,46.685 27.178,46.838 27.178,48.692 27.28,48.793 28.626,48.793 30.302,47.117
  region net DC5V_IN: 50.14,76.022 50.19,76.073 50.19,78.562 49.911,78.842 43.485,78.842 43.256,78.613 43.256,70.739 43.536,70.46 45.161,70.46 45.466,70.764 45.466,75.438 46.05,76.022
  region net DC5V_IN: 18.745,67.564 18.923,67.742 19.787,67.742 20.066,67.462 20.066,60.071 19.685,59.69 17.882,59.69 17.653,59.919 17.653,62.535 18.745,63.627
  region net V4.7V: 50.292,56.007 50.419,55.88 52.756,55.88 54.534,57.658 54.534,63.957 53.899,64.592 48.26,64.592 48.082,64.414 48.082,63.221 48.133,63.17 50.749,63.17 52.578,61.341 52.578,56.896 52.324,56.642 50.419,56.642 50.292,56.515
  region net DC9V_IN: 16.612,70.333 16.815,70.536 16.815,73.736 16.256,74.295 13.284,74.295 13.284,70.917 13.868,70.333
  region net DC9V: 17.475,70.536 17.653,70.358 20.955,70.358 21.412,70.815 21.412,79.045 21.082,79.375 17.78,79.375 17.475,79.07
  region net GND: 55.753,15.875 55.626,15.748 55.626,14.224 55.88,13.97 59.817,13.97 59.944,14.097 59.944,15.748 59.817,15.875
  region net GND: 22.682,33.934 22.758,33.858 24.46,33.858 24.917,34.315 26.645,34.315 30.302,37.973 30.302,38.227 30.124,38.405 25.273,38.405 22.682,35.814
  region net GND: 30.302,7.264 30.353,7.315 30.353,9.982 28.067,12.268 27.711,12.268 27.711,8.204 28.651,7.264
  region net GND: 19.431,7.112 19.177,7.366 19.177,9.906 21.234,11.963 21.234,12.294 21.565,12.294 21.565,7.722 20.955,7.112
  region net GND: 40.781,22.53 41.046,22.795 41.046,26.543 40.97,26.619 38.075,26.619 37.936,26.481 37.936,22.657 38.063,22.53
  region net GND: 47.498,41.961 47.6,42.062 49.098,42.062 49.886,42.85 51.283,42.85 51.41,42.723 51.41,41.631 52.299,40.742 53.95,40.742 54,40.691 54,38.837 53.899,38.735 47.777,38.735 47.498,39.014
  region net GND: 46.228,75.311 46.355,75.438 50.902,75.438 51.054,75.286 51.054,66.878 50.47,66.294 48.006,66.294 47.396,66.904 47.396,71.984 46.228,73.152
  region net GND: 13.081,59.69 14.859,59.69 14.986,59.817 14.986,62.484 15.367,62.865 15.367,65.507 15.545,65.684 15.545,67.564 15.367,67.742 12.243,67.742 11.811,67.31 11.811,59.944 12.065,59.69
  region net GND: 25.146,71.653 25.273,71.78 26.213,71.78 28.118,69.875 28.118,66.04 27.889,65.811 23.546,65.811 23.495,65.862 23.495,67.31 25.146,68.961
  region net GND: 9.398,18.186 9.474,18.263 10.947,18.263 12.852,16.358 12.852,13.589 12.725,13.462 9.652,13.462 9.398,13.716
  region net GND: 26.619,59.501 26.492,59.374 26.492,55.601 26.568,55.524 29.286,55.524 29.464,55.702 29.464,59.374 29.337,59.501
  region net GND: 8.941,55.118 9.068,55.245 9.068,59.36 8.992,59.436 6.223,59.436 6.096,59.309 6.096,55.245 6.223,55.118
  region net GND: 32.842,64.033 32.944,63.932 35.56,63.932 35.992,64.364 35.992,67.056 35.56,67.488 33.68,67.488 33.63,67.437 33.63,66.269 32.842,65.481
Bottom Layer:
  region net GND: 39.929,71.755 39.98,71.806 40.894,71.806 40.945,71.755 40.945,63.17 40.716,62.941 36.525,62.941 36.297,63.17 36.297,66.904 39.929,70.536
Int2 (PWR) (plane layer: these items are gaps in the copper):
  lines w0.7: -0.102,67.92 24.257,67.92 24.257,70.231 31.687,70.231 31.687,80.061 ; -0.076,62.992 4.851,62.992 4.851,56.896 -0.025,56.896 ; 0,51.206 8.153,51.206 8.153,46.279 25.324,46.279 25.324,49.378 37.846,49.378 37.846,54.966 53.238,54.966 56.325,54.966 56.325,66.827 46.685,66.827 46.66,66.802 46.66,71.425 57.506,71.425 61.005,67.925 70.18,67.925 70.18,62.85 80.061,62.85 ; 15.215,46.304 15.215,50.292 17.501,52.578 25.146,52.578 25.146,59.969 46.66,59.969 46.66,66.815 ; 17.348,80.01 17.348,70.663 21.844,70.663 21.844,80.01 ; 80.264,31.242 69.825,31.242 69.825,11.709 74.422,7.112 80.315,7.112

## Dimensions
0,79.999 to 0,0 on Mechanical 10
0,79.999 to 79.995,79.999 on Mechanical 10

## Text inside footprints (layer, text, board x,y; h text height)
C4: Mechanical 1 "R?" at 46.99,75.719 h0.5 r270
C19: Top Overlay "+" at 33.738,23.916 h2 r180
L3: Mechanical 1 "L?" at 54.635,43.307 h0.3 r180
P2: Mechanical 1 "4" at 2.794,48.325 h1.2 r90; Mechanical 1 "1" at 2.794,40.705 h1.2 r90; Mechanical 1 "HD?" at 2.49,44.819 h0.8 r90
P3: Mechanical 1 "HD?" at 2.59,59.959 h0.8 r270; Mechanical 1 "2" at 2.286,58.993 h1.2 r270; Mechanical 1 "1" at 2.286,61.533 h1.2 r270
R21: Mechanical 1 "R?" at 9.36,55.88 h0.5 r180
R30: Mechanical 1 "R?" at 61.747,21.501 h0.5 r270